# Altium PCB led_pcb.PcbDoc
Units mm, origin at the board's own origin, x right, y up, seen from the top; angles counter-clockwise.
Board outline 60 x 25 mm, 2 copper layers (Top Layer, Bottom Layer), stack 1.671 mm thick; 28 components, 26 nets, 77 pads, 12 vias.
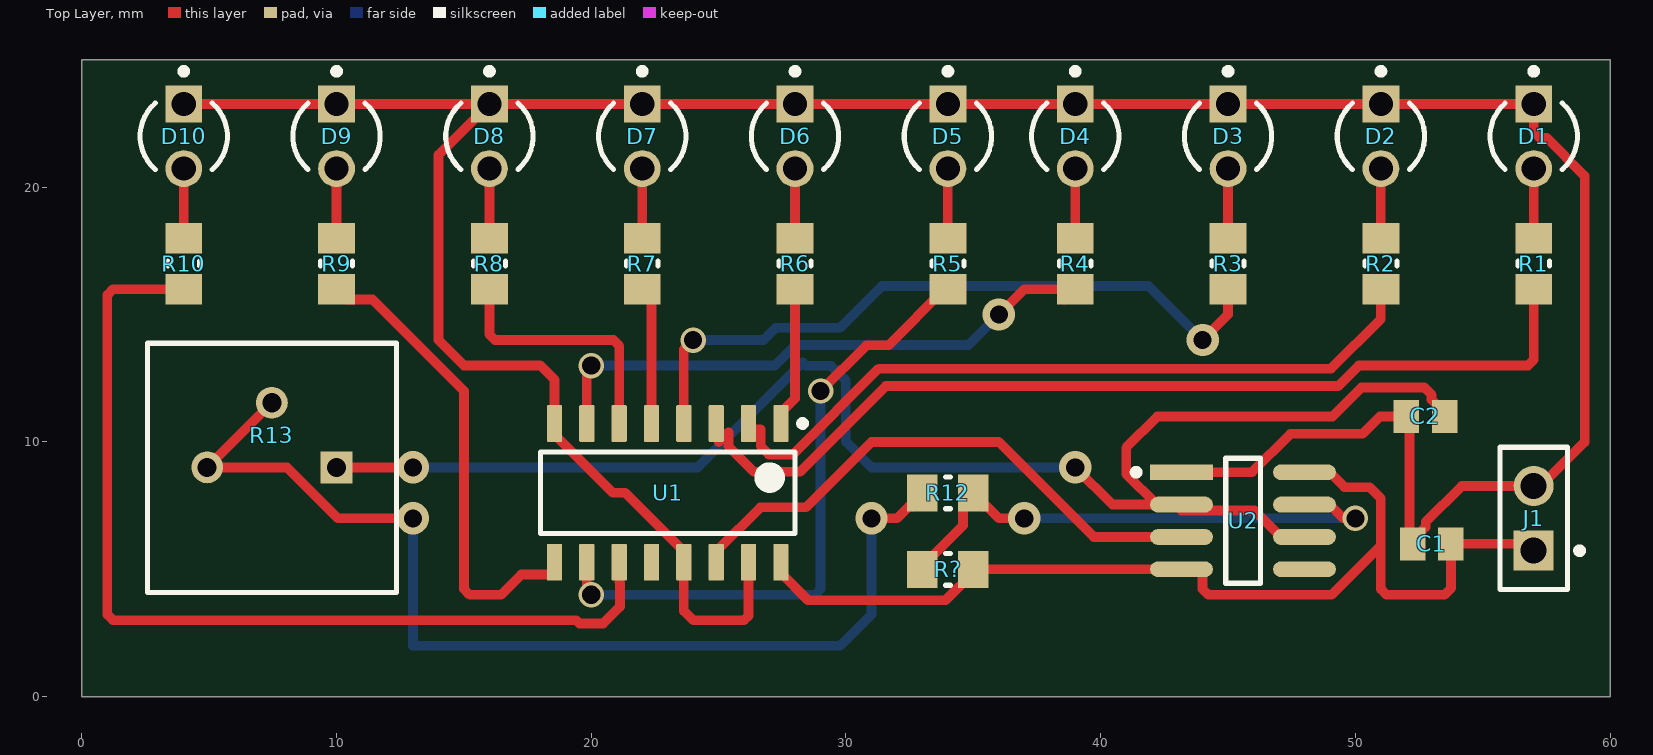
[diagram p0: Top Layer view]
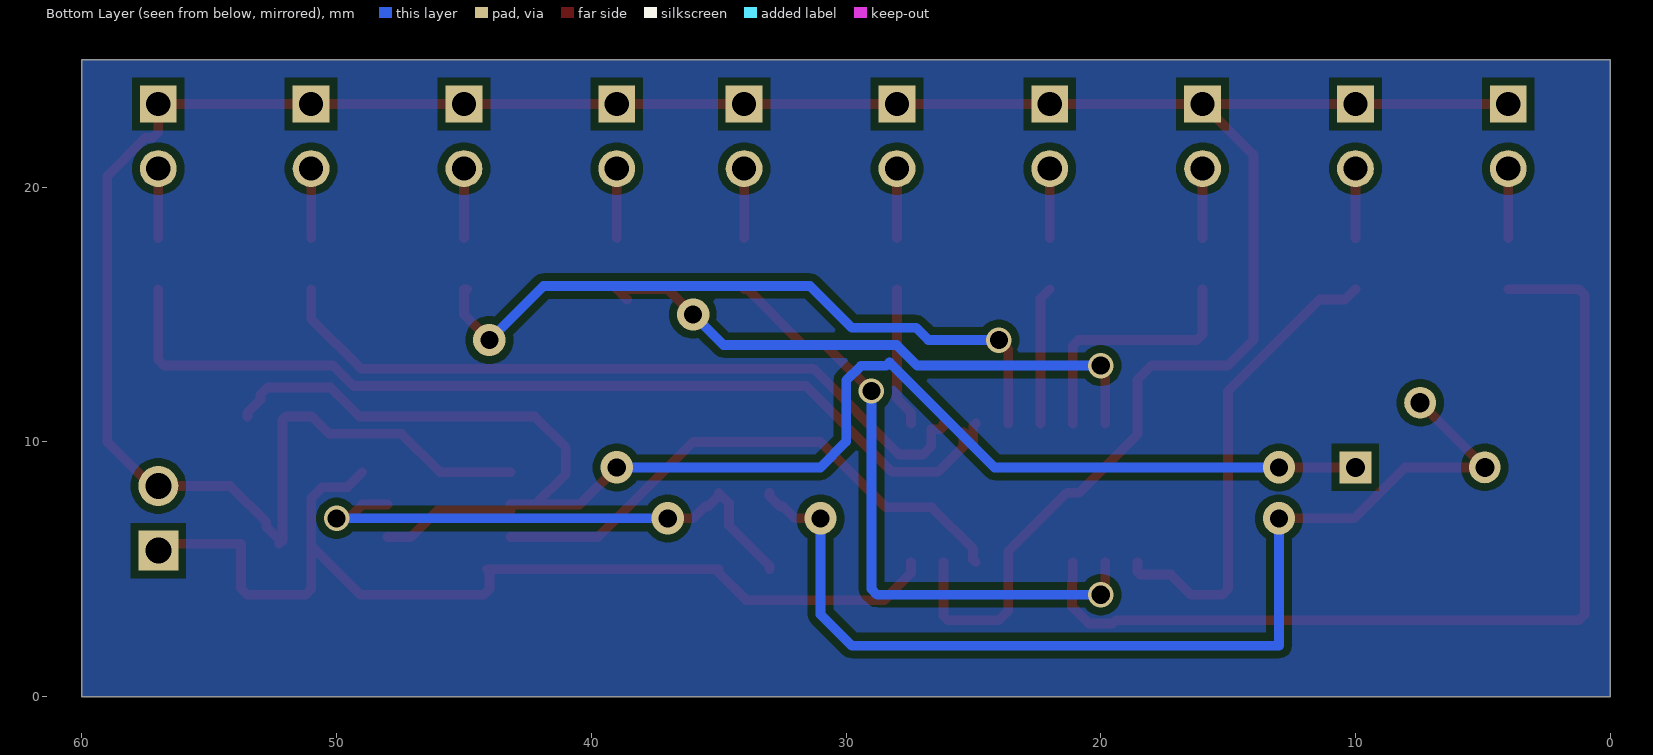
[diagram p1: Bottom Layer view, seen from below]
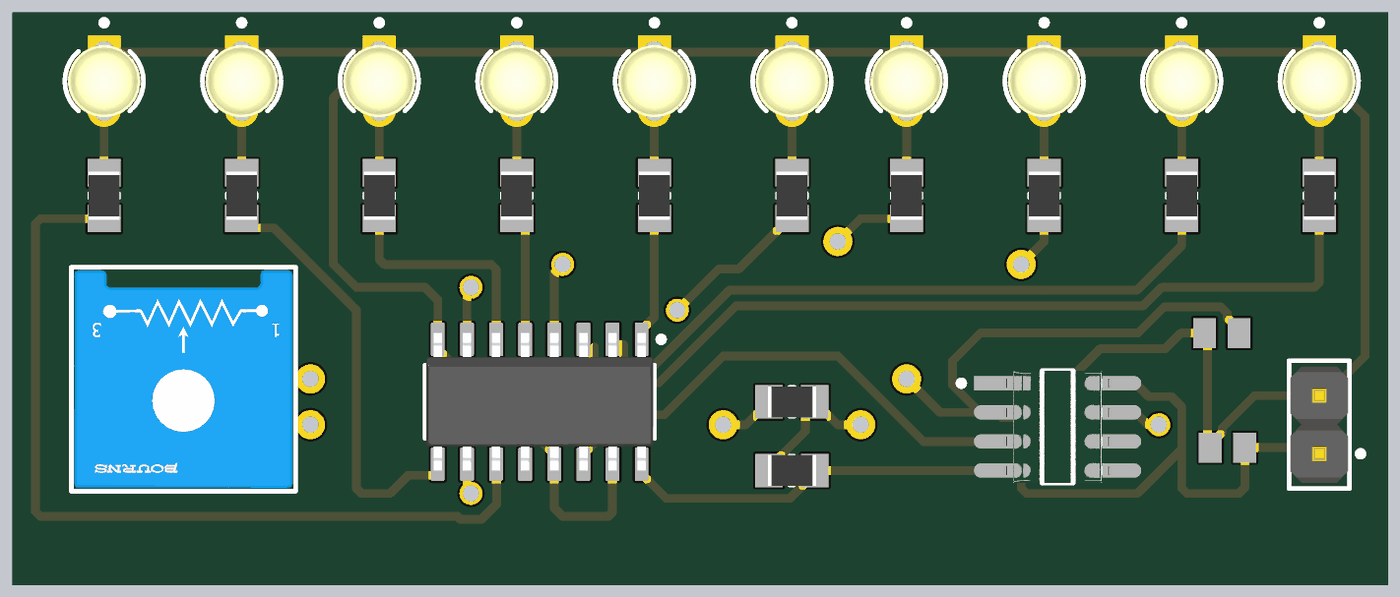
[diagram p2: 3D render of the assembled board from above, using the file's embedded part models]

## Layer stack, top to bottom
Top Solder: solder mask 0.0102, Solder Resist, Dk 3.5
Top Layer: signal copper 0.0356
Dielectric 1: dielectric 1.6, FR-4, Dk 4.8
Bottom Layer: signal copper 0.0356
Bottom Solder: solder mask 0.0102, Solder Resist, Dk 3.5

## Board outline
0,0 60,0 60,25 0,25

## Design rules (kind name [scope] priority, off if disabled: settings)
Clearance [All] p1: gap=0.3 ignorepadtopadclearanceinfootprint=FALSE
PolygonConnect [All] p1: connectstyle=Relief reliefconductorwidth=0.254 reliefentries=4 polygonreliefangle="90 Angle" airgapwidth=0.254
RoutingVias [All] p1: holewidth=0.3 width=0.6 viastyle="Through Hole" minholewidth=0.3 minwidth=0.6 maxholewidth=0.3 maxwidth=0.6
SilkToSolderMaskClearance [IsPad] p1: minsilkscreentomaskgap=0.1 clearancetoexposedcopper=TRUE
SolderMaskExpansion [All] p1: expansion=0.102 istentingtop=FALSE
UnRoutedNet [All] p1: checkbadconnections=TRUE
Width [All] p1: maxlimit=1 minlimit=0.3 preferedwidth=0.5
28 further rules are at their usual default settings.

## Components (designator, comment, footprint, x,y, rotation, side; value= is the part's Value field where it differs from the comment)
C1 "GRM21BR71H105KA12L" CAPC2013X135X45LL10T25 53,6 r0 top
C2 "c1" CAPC2013X135X45LL10T25 52.75,11 r0 top
D1 "HLMP-1719" FP-HLMP-1719-MFG 57,22 r270 top
D2 "HLMP-1719" FP-HLMP-1719-MFG 51,22 r270 top
D3 "HLMP-1719" FP-HLMP-1719-MFG 45,22 r270 top
D4 "HLMP-1719" FP-HLMP-1719-MFG 39,22 r270 top
D5 "HLMP-1719" FP-HLMP-1719-MFG 34,22 r270 top
D6 "HLMP-1719" FP-HLMP-1719-MFG 28,22 r270 top
D7 "HLMP-1719" FP-HLMP-1719-MFG 22,22 r270 top
D8 "HLMP-1719" FP-HLMP-1719-MFG 16,22 r270 top
D9 "HLMP-1719" FP-HLMP-1719-MFG 10,22 r270 top
D10 "HLMP-1719" FP-HLMP-1719-MFG 4,22 r270 top
J1 "M20-9990245" FP-M20-9990245-MFG 57,7 r90 top
R1 "RC0805FR-071KL" RESC2013X60X35ML10T20 57,17 r90 top
R2 "RC0805FR-071KL" RESC2013X60X35ML10T20 51,17 r90 top
R3 "RC0805FR-071KL" RESC2013X60X35ML10T20 45,17 r90 top (schematic designator R)
R4 "RC0805FR-071KL" RESC2013X60X35ML10T20 39,17 r90 top
R5 "RC0805FR-071KL" RESC2013X60X35ML10T20 34,17 r90 top
R6 "RC0805FR-071KL" RESC2013X60X35ML10T20 28,17 r90 top
R7 "RC0805FR-071KL" RESC2013X60X35ML10T20 22,17 r90 top
R8 "RC0805FR-071KL" RESC2013X60X35ML10T20 16,17 r90 top
R9 "RC0805FR-071KL" RESC2013X60X35ML10T20 10,17 r90 top
R10 "RC0805FR-071KL" RESC2013X60X35ML10T20 4,17 r90 top
R12 "RC0805FR-071KL" RESC2013X60X35ML10T20 34,8 r0 top
R13 "3386P-1-104LF" FP-3386P-MFG 7.46,8.985 r180 top
R? "R11" RESC2013X60X35ML10T20 34,5 r0 top
U1 "CD4017BM" D0016A_N 23,8 r270 top
U2 "NE555DR" FP-D0008A-IPC_A 45.586,6.905 r0 top

## Footprints (in the part's own frame and the unit in brackets; to place one, negate y for a bottom-side part, rotate by r counter-clockwise, add the part's x,y. Pads: shape width x height; smd on the part's side, far side on the other; paste and mask are expansions set on the pad)
CAPC2013X135X45LL10T25 [mm] "Chip Capacitor, 2-Leads, Body 2.00x1.25mm, IPC High Density"
  rect 1x1.3 smd: 1(-0.75,0) 2(0.75,0)
  body extent -1.05,-0.67 1.05,0.68, height 1.35
D0016A_N [mm] "SOIC, 16-Leads, Body 10x4mm, Pitch 1.27mm, IPC Medium Density"
  rrect17% 1.45x0.6 smd: 1(-2.725,4.445) 2(-2.725,3.175) 3(-2.725,1.905) 4(-2.725,0.635) 5(-2.725,-0.635) 6(-2.725,-1.905) 7(-2.725,-3.175) 8(-2.725,-4.445) 9(2.725,-4.445) 10(2.725,-3.175) 11(2.725,-1.905) 12(2.725,-0.635) 13(2.725,0.635) 14(2.725,1.905) 15(2.725,3.175) 16(2.725,4.445)
  silkscreen extent -2.85,-5 1.6,5.42, body extent -3,-4.95 3,4.95, height 1.59
FP-3386P-MFG [mm]
  rect 1.25x1.25 hole 0.75 paste-1000 mask+0: 1(-2.54,-0.015)
  round 1.25 hole 0.75 paste-1000 mask+0: 2(0,-2.555) 3(2.54,-0.015)
  silkscreen extent -4.89,-4.89 4.89,4.89, body extent -4.99,-4.99 4.99,4.99, height 0.25
FP-D0008A-IPC_A [mm]
  rect 2.469x0.622 smd paste+0 mask+0: 1(-2.414,1.905)
  rrect100% 2.469x0.622 smd paste+0 mask+0: 2(-2.414,0.635) 3(-2.414,-0.635) 4(-2.414,-1.905) 5(2.414,-1.905) 6(2.414,-0.635) 7(2.414,0.635) 8(2.414,1.905)
  silkscreen extent -4.32,-2.45 0.68,2.45, body extent -4.15,-2.95 4.15,2.95, height 0.25
FP-HLMP-1719-MFG [mm]
  rect 1.45x1.45 hole 0.95 paste-1000 mask+0: 1(-1.27,0)
  round 1.45 hole 0.95 paste-1000 mask+0: 2(1.27,0)
  silkscreen extent -2.67,-1.71 1.3,1.71, body extent -2.22,-2.22 2.22,2.22, height 0.25
FP-M20-9990245-MFG [mm]
  rect 1.57x1.57 hole 1.02 paste-1000 mask+0: 1(-1.27,0)
  round 1.57 hole 1.02 paste-1000 mask+0: 2(1.27,0)
  silkscreen extent -2.79,-1.92 2.79,1.32, body extent -2.89,-1.42 2.89,1.42, height 0.25
RESC2013X60X35ML10T20 [mm] "Chip Resistor, 2-Leads, Body 2.1x1.35mm, IPC Low Density"
  rect 1.2x1.45 smd: 1(-1,0) 2(1,0)
  silkscreen extent -0.1,-0.63 0.1,0.63, body extent -1.05,-0.68 1.05,0.67, height 0.6

## Part data
C1: library part CMP-1036-04761-2, Manufacturer=Murata, Part Number=GRM21BR71H105KA12L
C2: library part CMP-1036-04761-2, Manufacturer=Murata, Part Number=GRM21BR71H105KA12L
D1 D2 D3 D4 D5 D6 D7 D8 D9 D10: library part CMP-2000-06410-2, "LED YELLOW DIFFUSED T-1 T/H", Colour=Yellow, Forward Current=2mA, Forward Voltage=1.8V, Manufacturer=Broadcom, Package=0, Power Dissipation=17.5mW, Reverse Voltage=5V, Temperature="-40°C to +100°C", Temperature Range High=+100°C, Temperature Range Low=-40°C, Automotive=No, Category=Diode, ComponentLink2Description=Datasheet, ComponentLink2URL=https://docs.broadcom.com/docs/AV02-1557EN, Device Class L1=Optoelectronics, Device Class L2=LEDs, Device Class L3=unset, Digikey Description="LED YELLOW DIFFUSED T-1 T/H", Lead Free=Yes, Led Orientation=Straight, Luminous Intensity=2.1mcd, Manufacturer Part Number=HLMP-1719, Mouser Description="Standard LEDs - Through Hole Yellow Diffused 585nm 2.1mcd", Octopart=https://octopart.com/hlmp-1719-broadcom-71130405, RoHS=TRUE, Viewing Angle=50°, Wavelength=585nm
J1: library part CMP-15831-000105-1, "CONN HEADER VERT 2POS 2.54MM", Case/Package=SIL, Color=Black, Contact Resistance=25mR, Current=3A, Flammability Rating="UL94 V-0", Insulation Resistance=10GR, Max Operating Temperature=105°C, Min Operating Temperature=-40°C, Package Quantity=1000, Voltage=50V, Voltage Rating (AC)=750V, Connector Type="Male Pin", Contact Finish - Mating=GOLD, Contact Material=Brass, Contact Mating Length=0.24inch, Contact Plating=Gold, Contact Shape=Square, Contact Type="Male Pin", Current Rating=3A, Depth=2.54mm, Fastening Type=Pull, Gender=Male, Height=0.12inch, Housing Color=Black, Housing Material=Nylon, Insulation Color=Black, Insulation Material=Nylon, Lead Pitch=2.54mm, Length=5.08mm, Mated Stacking Heights=16.54mm, Mating Cycles=300, Max Current Rating=3A, Mount="Through Hole", Number of Contacts=2, Number of Poles=2, Number of Positions=2, Number of Rows=1, Orientation=Straight, Packaging=Bulk, Pitch=2.54mm, Radiation Hardening=No, Reach SVHC Compliant=Yes, Series=M20, Termination=Solder, Weight=0.25lb, Width=0.25inch, Working Voltage=750V
R1 R2 R3 R4 R5 R6 R7 R8 R9 R10 R12 R?: library part CMP-2100-03671-1, "Chip Resistor, 1 KOhm, +/- 1%, 125 mW, -55 to 155 degC, 0805 (2012 Metric), RoHS, Tape and Reel", Case Code (Imperial)=0805, Case Code (Metric)=2012, Manufacturer=Yageo, Max Operating Temperature=155degC, Max Power Dissipation=125mW, Min Operating Temperature=-55degC, Package Description="2-Pin Surface Mounted Device, Body 2 x 1.25 mm", Package Quantity=1, Resistance=1KOhm, Temperature Coefficient=100ppm/degreesC, Tolerance=1%, Voltage Rating=150V, Case/Package=0805, Composition=ThickFilm, Datasheet URL=http://www.yageo.com/NewPortal/yageodocoutput?fileName=/pdf/R-Chip/PYu-RC_Group_51_RoHS_L_5.pdf, Datasheet Version="Rev. 5, 10/2016", Depth=1.25mm, Height=0.024inch, Lead Free=LeadFree, Length=0.079inch, Manufacturer URL=http://www.yageo.com/, Military Standard=Not, Number of Pins=2, Number of Terminations=2, Package Reference=0805, Packaging=TapeandReel, Power Rating=125mW, REACH SVHC=Unknown, RoHSCompliant=true, Termination=SMD/SMT, Voltage Rating (DC)=150V, Width=0.049inch
R13: library part CMP-2000-05592-8, "TRIMMER 100K OHM 0.5W PC PIN TOP", Color=Blue, Manufacturer Series=3386, Max Operating Temperature=125°C, Max Power Dissipation=500mW, Min Operating Temperature=-55°C, Package Quantity=100, Resistance=100kR, Resistance Law=Linear, Resistance Tolerance=10%, Resistor Type=Cermet, Temperature Coefficient=100ppm/°C, Voltage Rating=300V, Actuator Orientation=Vertical, Actuator Type=SCREW, Contact Plating=Tin, Depth=9.53mm, Height=4.83mm, Lead Free="Contains Lead", Length=9.53mm, Military Standard=Not, Mount="Through Hole", Number of Pins=3, Number of Terminals/Pins=3, Number of Turns=1, Packaging=Rail/Tube, Power Rating=500mW, Radiation Hardening=No, Reach SVHC Compliant=Yes, RoHS Compliant=Yes, Series="Trimpot® 3386 - Sealed", Taper=Linear, Technology=CERMET, Terminal Finish=Tin, Termination=Pin, Tolerance=10%, Type=Potentiometer, Weight=0.03oz, Width=9.53mm
U1: library part CMP-1623-00071-2, "CMOS Decade Counter with 10 Decoded Outputs, D0016A, TUBE", F @ Nom Voltage(Max)(Mhz)=8, Generic Part Number=CD4017B, ICC @ Nom Voltage(Max)(mA)=0.03, Manufacturer="Texas Instruments", Operating Temperature Range(C)="-55 to 125", Rating=Military, tpd @ Nom Voltage(Max)(ns)=270, Voltage(Nom)(V)=10, Bits(#)=10, Code_JEDEC="MS-012 variation AC", DatasheetVersion=SCHS027C, Function=Counter, Input Type=CMOS, Inputs=1, Output Drive (IOL/IOH)(Max)(mA)=1.5/-1.5, Output Type=CMOS, PackageReference=D0016A, Schmitt Trigger=No, Technology Family=CD4000, Type=Decade, VCC(Max)(V)=18, VCC(Min)(V)=3
U2: library part CMP-1685-00007-2, "IC OSC SGL TIMER 100KHZ 8-SOIC", Case/Package=SOIC, Frequency=100kHz, High Level Output Current=-200mA, Low Level Output Current=200mA, Max Operating Temperature=70°C, Max Supply Voltage=16V, Min Operating Temperature=0°C, Min Supply Voltage=4.5V, Operating Supply Current=10mA, Package Quantity=2500, Quiescent Current=15mA, Contact Plating=Gold, Height=1.58mm, Lead Free="Lead Free", Length=4.9mm, Mount="Surface Mount", Number of Pins=8, Number of Timers/Counters=1, Packaging="Tape and Reel", Radiation Hardening=No, REACH SVHC="No SVHC", Weight=0.002561oz, Width=3.91mm

## Via types
v1: diameter 1.27, hole 0.711, Top Layer to Bottom Layer, 7 vias
v2: diameter 1, hole 0.711, Top Layer to Bottom Layer, 5 vias

## Nets (pads, with @x,y where several pads share a name; then routed paths per layer and width w, separated by ;. In a path a pad name is that pad's centre, name@x,y a point inside that pad or via, vN(x,y) a via of type N, cw(c..) or ccw(c..) an arc to the next point about the centre after c; other vN are vias at no path point)
GND: C1.1 C2.1 D1.1 D2.1 D3.1 D4.1 D5.1 D6.1 D7.1 D8.1 D9.1 D10.1 J1.2 U1.8 U1.13 U1.15 U2.1 | length 122.2
  Top Layer w0.381: D10.1 D9.1 D8.1 ; U1.15 26.175,3.175 26,3 24,3 23.635,3.365 U1.13 23.635,5.7 21.335,8 20.855,8 18.555,10.3 U1.8 18.555,12.445 18,13 15,13 14,14 14,21.27 D8.1 ; U2.1 45.943,8.81 47.452,10.319 50.282,10.319 50.963,11 C2.1 52.125,10.875 C1.1@52.125,6.125 ; C1.1 52.25,6.15 52.759,6.659 52.759,6.853 54.176,8.27 J1.2 57.27,8.27 59,10 59,20.449 57.503,21.946 57.223,21.946 57,22.169 D1.1 D2.1 D3.1 D4.1 D5.1 D6.1 D7.1 D8.1
NetC2_2: C2.2 R13.1 U2.2 U2.6 | length 60.7
  Top Layer w0.381: R13.1 v1(13,9) ; v1(39,9) 40.46,7.54 U2.2@42.203,7.54 ; U2.2@43.173,7.306 46.041,7.306 47.076,6.27 U2.6 ; U2.2 U2.2@42.203,7.54 ; C2.2 53.5,11.15 52.991,11.659 52.991,11.853 52.703,12.141 50.238,12.141 49.098,11 42.223,11 41,9.777 41,8.743 U2.2@42.203,7.54
  Bottom Layer w0.381: v1(13,9) 24.168,9 28.294,13.126 28.429,12.991 29.41,12.991 29.991,12.41 29.991,10.009 31,9 v1(39,9)
NetD1_2: D1.2 R1.2 | length 2.7
  Top Layer w0.381: R1.2 D1.2
NetD2_2: D2.2 R2.2 | length 2.7
  Top Layer w0.381: R2.2 D2.2
NetD3_2: D3.2 R3.2 | length 2.7
  Top Layer w0.381: R3.2 D3.2
NetD4_2: D4.2 R4.2 | length 2.7
  Top Layer w0.381: R4.2 D4.2
NetD5_2: D5.2 R5.2 | length 2.7
  Top Layer w0.381: R5.2 D5.2
NetD6_2: D6.2 R6.2 | length 2.7
  Top Layer w0.381: R6.2 D6.2
NetD7_2: D7.2 R7.2 | length 2.7
  Top Layer w0.381: R7.2 D7.2
NetD8_2: D8.2 R8.2 | length 2.7
  Top Layer w0.381: R8.2 D8.2
NetD9_2: D9.2 R9.2 | length 2.7
  Top Layer w0.381: R9.2 D9.2
NetD10_2: D10.2 R10.2 | length 2.7
  Top Layer w0.381: R10.2 D10.2
NetR1_1: R1.1 U1.3 | length 38.5
  Top Layer w0.381: U1.3 25,10.63 25,10 25.103,10.103 25.385,10.385 25.385,9.827 26.383,8.829 28.2,8.829 31.565,12.194 49.328,12.194 50.135,13 56.777,13 57,13.223 R1.1
NetR2_1: R2.1 U1.2 | length 29.2
  Top Layer w0.381: U1.2 26.175,10.611 26.284,10.502 26.655,10.502 26.655,9.827 26.972,9.51 27.918,9.51 31.283,12.875 49.046,12.875 51,14.828 R2.1
NetR4_1: R4.1 U1.7 | length 23.2
  Top Layer w0.381: U1.7 19.825,12.825 v2(20,13) ; v1(36,15) 37,16 R4.1 R4.1@38.59,15.59
  Bottom Layer w0.381: v2(20,13) 27.205,13 28.012,13.807 34.806,13.807 v1(36,15)
NetR5_1: R5.1 U1.10 | length 24.9
  Top Layer w0.381: U1.10 19.825,4.175 v2(20,4) ; v2(29,12) 30.795,13.795 31.67,13.795 33.875,16 R5.1
  Bottom Layer w0.381: v2(20,4) 28.777,4 29,4.223 v2(29,12)
NetR6_1: R6.1 U1.1 | length 5.5
  Top Layer w0.381: U1.1 27.445,11.15 28,11.705 R6.1
NetR7_1: R7.1 U1.5 | length 5.4
  Top Layer w0.381: R7.1 22.365,15.635 U1.5
NetR8_1: R8.1 U1.6 | length 10.1
  Top Layer w0.381: R8.1 16,14.223 16.223,14 20.872,14 21.095,13.777 U1.6
NetR9_1: R9.1 U1.9 | length 18.8
  Top Layer w0.381: R9.1 10.41,15.59 11.41,15.59 15,12 15,4.223 15.223,4 16.464,4 17.256,4.792 18.446,4.792 18.555,4.901 U1.9
NetR10_1: R10.1 U1.11 | length 37.9
  Top Layer w0.381: R10.1 1.223,16 1,15.777 1,3.223 1.223,3 19.408,3 19.534,2.875 20.466,2.875 21.126,3.534 21.126,4.466 21.095,4.497 U1.11
NetR12_1: R12.1 R13.2 R13.3 | length 42.3
  Top Layer w0.381: R13.2 R13.3 8.056,9 10.056,7 v1(13,7) ; v1(31,7) 32,7 32.466,7.466 32.59,7.466 33,7.875 R12.1
  Bottom Layer w0.381: v1(13,7) 13,2 29.777,2 31,3.223 v1(31,7)
NetR12_2: R12.2 R?.1 U2.7 | length 21.1
  Top Layer w0.381: R?.1 33,5.125 34.59,6.715 34.59,7.591 R12.2 35,7.875 35.41,7.466 35.535,7.466 36,7 v1(37,7) ; U2.7 48.989,7.54 v2@49.529,7
  Bottom Layer w0.381: v1(37,7) v2(50,7)
NetR_1: R3.1 U1.4 | length 27.7
  Top Layer w0.381: U1.4 23.635,13.635 v2(24,14) ; v1(44,14) 45,15 R3.1 R3.1@44.875,16
  Bottom Layer w0.381: v2(24,14) 26.766,14 27.253,14.487 29.778,14.487 31.416,16.125 41.875,16.125 v1(44,14)
NetU1_14: U1.14 U2.3 | length 22
  Top Layer w0.381: U1.14 25.014,5.385 25.014,5.81 26.639,7.434 28.434,7.434 31,10 36,10 39.73,6.27 U2.3
VCC: C1.2 J1.1 R?.2 U1.16 U2.4 U2.8 | length 41.2
  Top Layer w0.381: U1.16 27.445,4.85 28.511,3.785 33.91,3.785 35,4.875 R?.2 U2.4 44.096,5 44,4.904 44,4.223 44.223,4 49.057,4 51,5.943 51,6.319 ; U2.8@48.989,8.81 49.574,8.225 50.552,8.225 51,7.777 51,6.319 ; J1.1 56.73,6 C1.2 53.75,4.25 53.5,4 51.223,4 51,4.223 51,6.319
pads on no net: U1.12 U2.5

## Polygon pours and split planes (outlines as drawn)
no net on Bottom Layer "NONET_L02_P000" (solid, pour order 0): 0,0 60,0 60,25 0,25